# Altium PCB MotorControllerBoard.PcbDoc
Units mil, origin at the board's own origin, x right, y up, seen from the top; angles counter-clockwise.
Board outline 1271.9 x 980 mil, 2 copper layers (Top Layer, Bottom Layer); 2 components, 3 nets, 112 pads, 20 vias.
Unrouted connection lines stored in the file: 2.
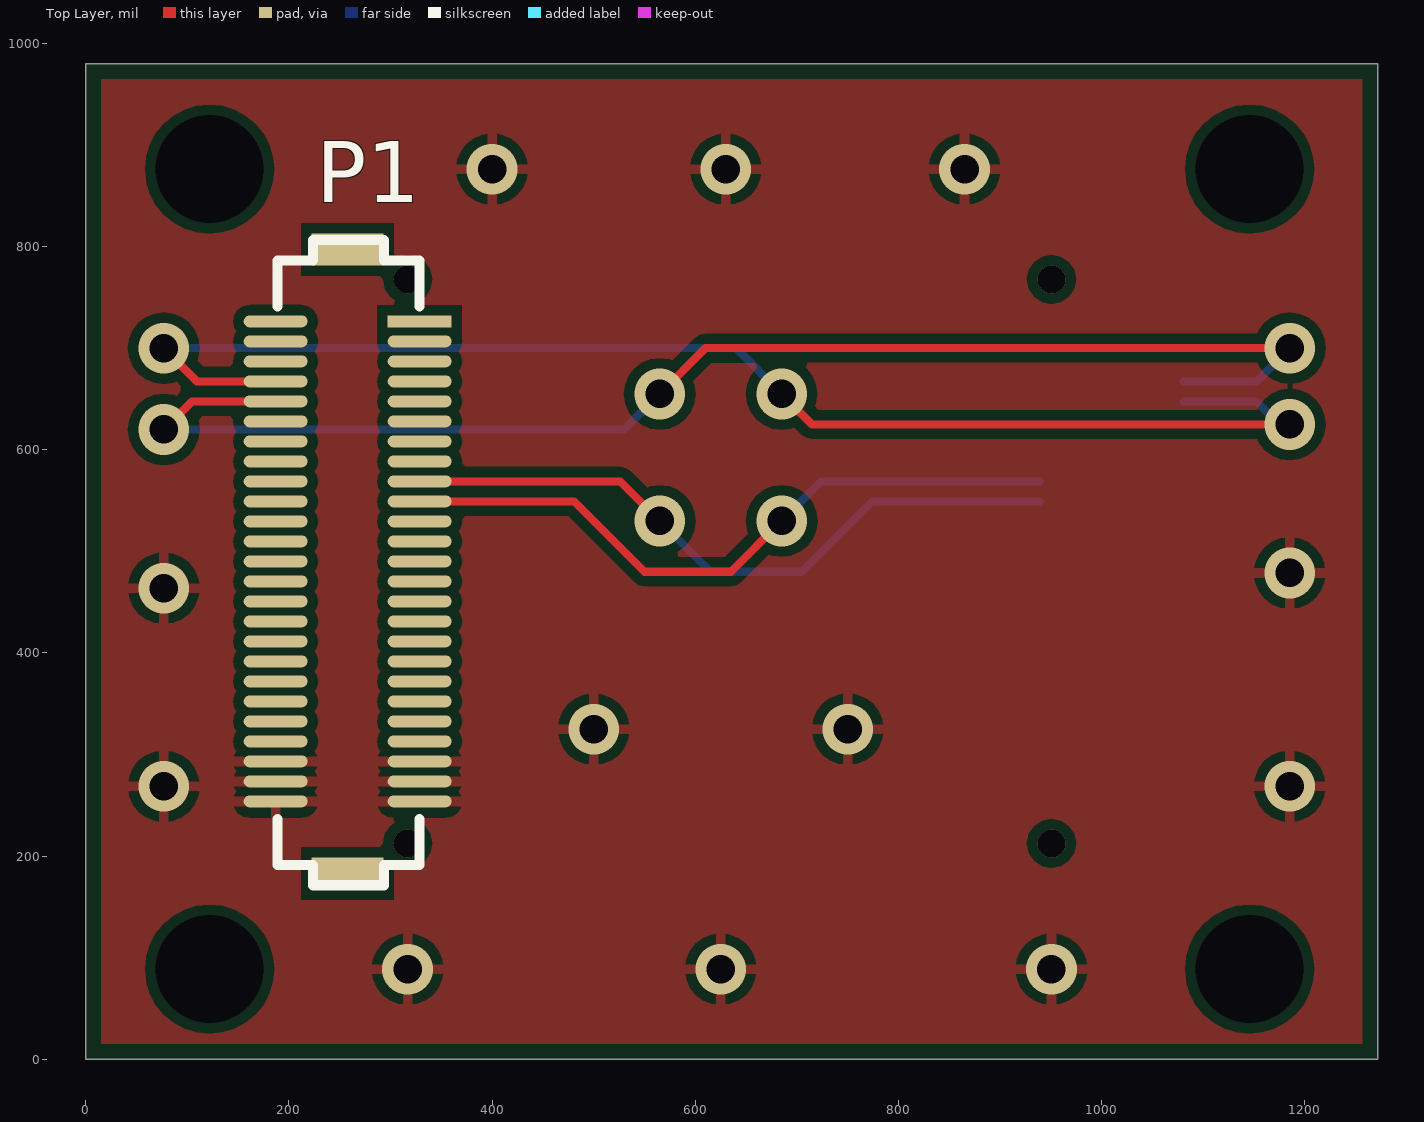
[diagram p0: Top Layer view]
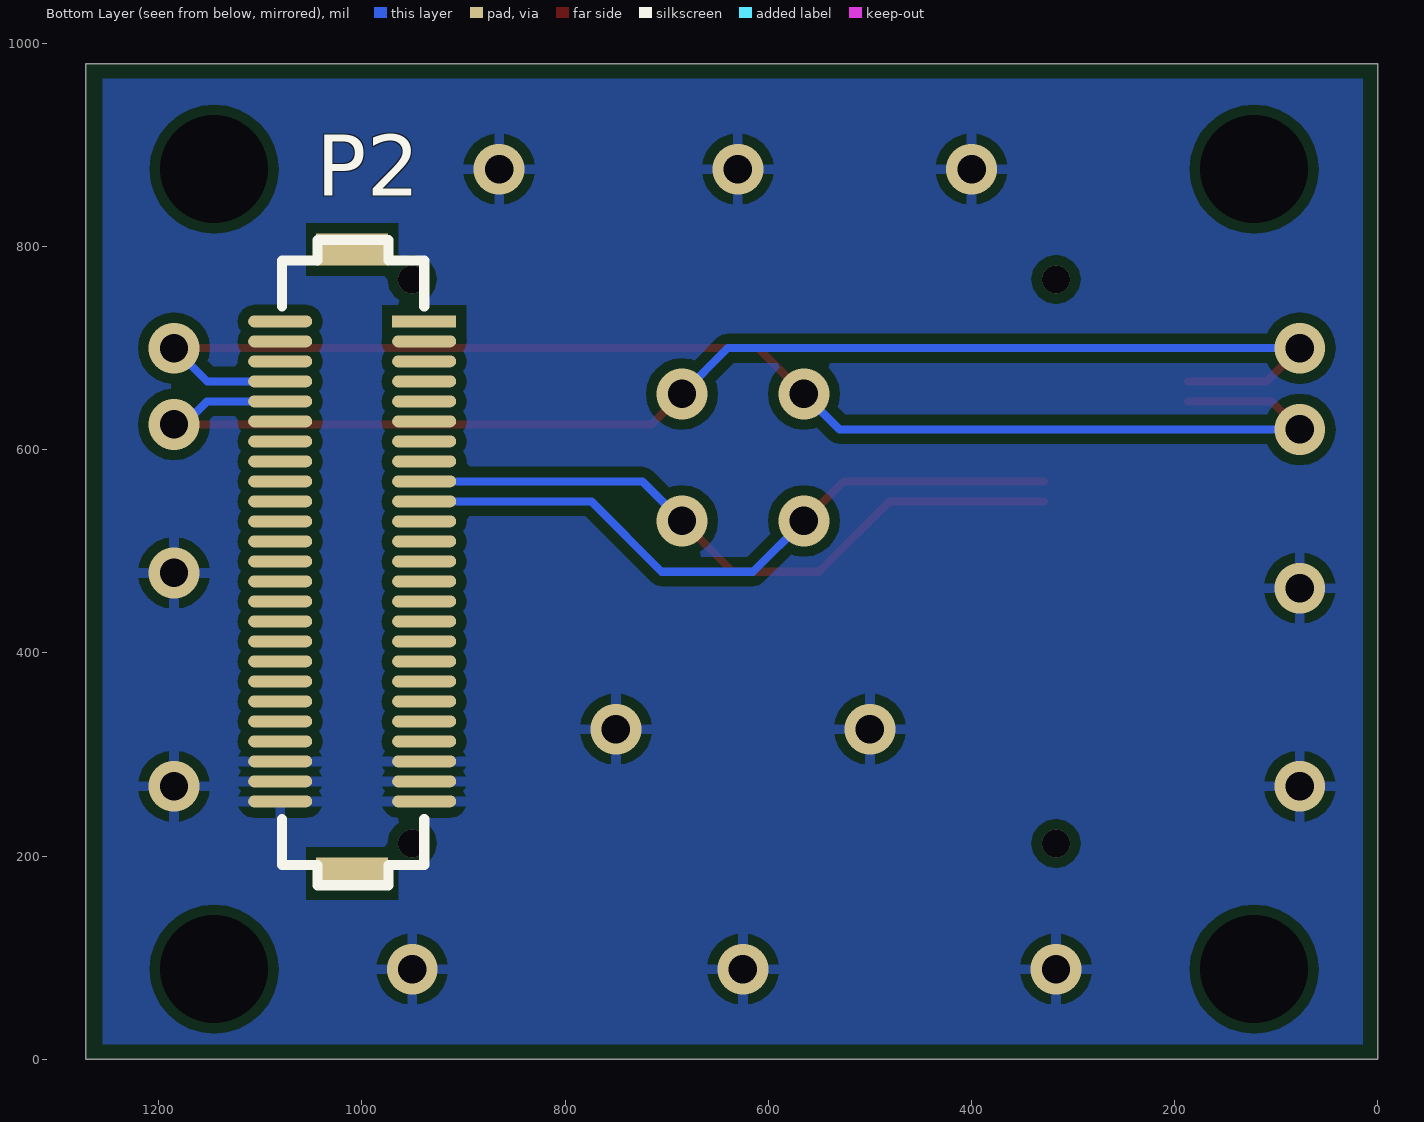
[diagram p1: Bottom Layer view, seen from below]

## Layer stack, top to bottom
Top Solder: solder mask 0.4, Solder Resist, Dk 3.5
Top Layer: signal copper 1.4
Dielectric 1: dielectric 12.6, FR-4, Dk 4.8
Bottom Layer: signal copper 1.4
Bottom Solder: solder mask 0.4, Solder Resist, Dk 3.5

## Board outline
0,0 1271.9,0 1271.9,980 0,980

## Design rules (kind name [scope] priority, off if disabled: settings)
Clearance [All] p1: gap=10 except(6: Track-Track Track-Via; 8: Track-SMDPad; 12: Track-THPad Track-Text SMDPad-SMDPad SMDPad-THPad SMDPad-Text THPad-THPad THPad-Via THPad-Text Via-Text Text-Text)
PolygonConnect [All] p1: connectstyle=Relief reliefconductorwidth=10 reliefentries=4 polygonreliefangle="90 Angle" airgapwidth=10
RoomDefinition MotorControllerBoard [InComponentClass('MotorControllerBoard')] p1: confinementstyle=ConfineIn formatcopy=TRUE lockcomponents=FALSE outline 0,0 1276.9,0 1276.9,980 0,980
RoutingVias [All] p1: holewidth=28 width=50 viastyle="Through Hole" minholewidth=28 minwidth=50 maxholewidth=28 maxwidth=50
SolderMaskExpansion [All] p1: expansion=4
Width [All] p1: maxlimit=8 minlimit=8 preferedwidth=8 minimp=50.000000 maximp=50.000000 favimp=50.000000 checkconnectedcopper=TRUE
30 further rules are at their usual default settings.

## Components (designator, comment, footprint, x,y, rotation, side; value= is the part's Value field where it differs from the comment)
P1 "BergStak Plug" 609-5226-1-ND 257.81,490.12 r180 bottom
P2 "BergStak Plug" 609-5226-1-ND 1009.6,490.12 r0 top

## Footprints (in the part's own frame and the unit in brackets; to place one, negate y for a bottom-side part, rotate by r counter-clockwise, add the part's x,y. Pads: shape width x height; smd on the part's side, far side on the other; paste and mask are expansions set on the pad)
609-5226-1-ND [mm] "Bergstack Plug"
  rect 1.6x0.3 smd far side: 1(-1.8,6)
  oval 1.6x0.3 smd far side: 2(-1.8,5.5) 3(-1.8,5) 4(-1.8,4.5) 5(-1.8,4) 6(-1.8,3.5) 7(-1.8,3) 8(-1.8,2.5) 9(-1.8,2) 10(-1.8,1.5) 11(-1.8,1) 12(-1.8,0.5) 13(-1.8,0) 14(-1.8,-0.5) 15(-1.8,-1) 16(-1.8,-1.5) 17(-1.8,-2) 18(-1.8,-2.5) 19(-1.8,-3) 20(-1.8,-3.5) 21(-1.8,-4) 22(-1.8,-4.5) 23(-1.8,-5) 24(-1.8,-5.5) 25(-1.8,-6) 26(1.8,-6) 27(1.8,-5.5) 28(1.8,-5) 29(1.8,-4.5) 30(1.8,-4) 31(1.8,-3.5) 32(1.8,-3) 33(1.8,-2.5) 34(1.8,-2) 35(1.8,-1.5) 36(1.8,-1) 37(1.8,-0.5) 38(1.8,0) 39(1.8,0.5) 40(1.8,1) 41(1.8,1.5) 42(1.8,2) 43(1.8,2.5) 44(1.8,3) 45(1.8,3.5) 46(1.8,4) 47(1.8,4.5) 48(1.8,5) 49(1.8,5.5) 50(1.8,6)
  round 0.7 hole 0.7: ""(-1.5,-7.05) ""(-1.5,7.05)
  rect 1.8x0.8 smd far side: ""(0,-7.8) ""(0,7.8)

## Part data
P1 P2: library part "BergStak 50 Position Connector Plug", "50 Position Connector Plug, Outer Shroud Contacts Surface Mount Gold"

## Free pads (board coordinates)
  round 60 hole 106.3: 1(121.9,88.78) 2(121.9,876.18) 3(1145.52,876.18) 4(1145.52,88.78)

## Via types
v1: diameter 50, hole 28, Top Layer to Bottom Layer, 20 vias

## Nets (pads, with @x,y where several pads share a name; then routed paths per layer and width w, separated by ;. In a path a pad name is that pad's centre, name@x,y a point inside that pad or via, vN(x,y) a via of type N, cw(c..) or ccw(c..) an arc to the next point about the centre after c; other vN are vias at no path point)
GND: P1.23 P1.24 P1.25 P1.26 P1.27 P1.28 P2.23 P2.24 P2.25 P2.26 P2.27 P2.28
  other v1: 316.87,88.78 625,88.78 950.55,88.78 76.9,268.78 1185,268.78 500,325 750,325 76.9,463.78 1185,478.78 400,876.18 630,876.18 865,876.18
UART1_RX: P1.9 P1.10 P2.9 P2.10 | length 1351
  Top Layer w8: P1.10 480.83,549.17 550,480 635,480 v1(685,530) ; P1.9 526.14,568.86 v1(565,530)
  Bottom Layer w8: v1(565,530) 615,480 705,480 774.17,549.17 P2.10 ; v1(685,530) 723.86,568.86 P2.9
UART3_TX: P1.46 P1.47 P2.46 P2.47 | length 2757.5
  Top Layer w8: v1(76.9,620) 104.5,647.6 P1.46 ; v1(76.9,700) 109.62,667.28 P1.47 ; v1(565,655) 610,700 v1(1185,700) ; v1(685,655) 715,625 v1(1185,625)
  Bottom Layer w8: v1(76.9,620) 530,620 v1(565,655) ; v1(76.9,700) 640,700 v1(685,655) ; P2.46 1152.4,647.6 1175,625 v1(1185,625) ; P2.47 1152.28,667.28 v1(1185,700)
pads on no net: P1. P1.1 P1.2 P1.3 P1.4 P1.5 P1.6 P1.7 P1.8 P1.11 P1.12 P1.13 P1.14 P1.15 P1.16 P1.17 P1.18 P1.19 P1.20 P1.21 P1.22 P1.29 P1.30 P1.31 P1.32 P1.33 P1.34 P1.35 P1.36 P1.37 P1.38 P1.39 P1.40 P1.41 P1.42 P1.43 P1.44 P1.45 P1.48 P1.49 P1.50 P2. P2.1 P2.2 P2.3 P2.4 P2.5 P2.6 P2.7 P2.8 P2.11 P2.12 P2.13 P2.14 P2.15 P2.16 P2.17 P2.18 P2.19 P2.20 P2.21 P2.22 P2.29 P2.30 P2.31 P2.32 P2.33 P2.34 P2.35 P2.36 P2.37 P2.38 P2.39 P2.40 P2.41 P2.42 P2.43 P2.44 P2.45 P2.48 P2.49 P2.50

## Polygon pours and split planes (outlines as drawn)
GND on Top Layer "GND Plane" (solid, pour order 0): 0,0 1271.9,0 1271.9,980 0,980 0,0
GND on Bottom Layer "GND Plane" (solid, pour order 2): 15,15 1255,15 1255,965 15,965 15,15